# Altium PCB PowerPCB.PcbDoc
Units mil, origin at the board's own origin, x right, y up, seen from the top; angles counter-clockwise.
Board outline 868.14 x 1880.9 mil, 2 copper layers (Top Layer, Bottom Layer); 73 components, 62 nets, 276 pads, 127 vias.
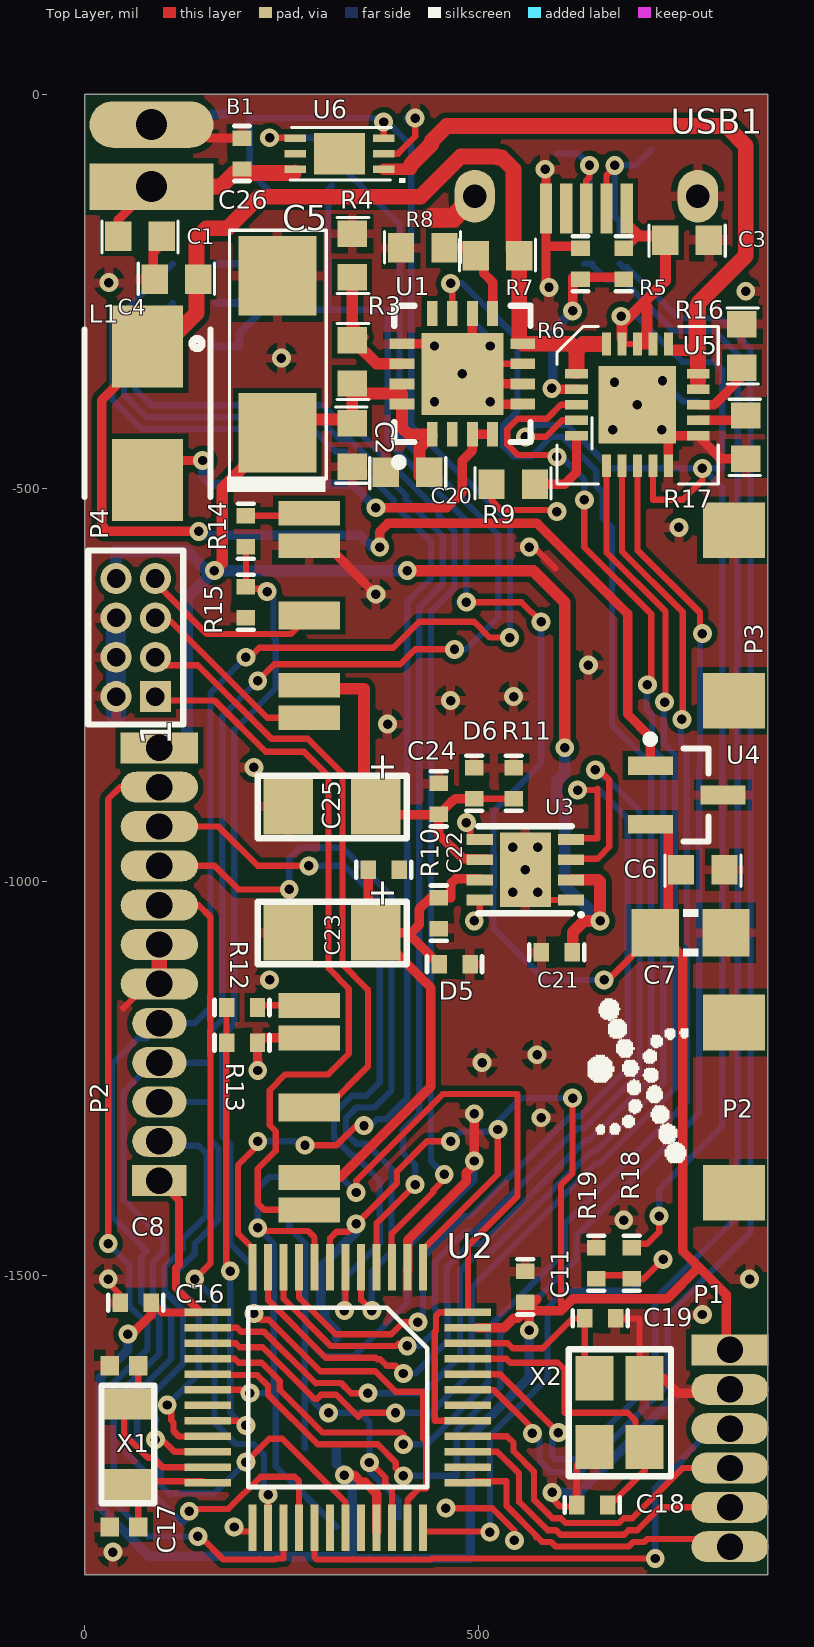
[diagram p0: Top Layer view]
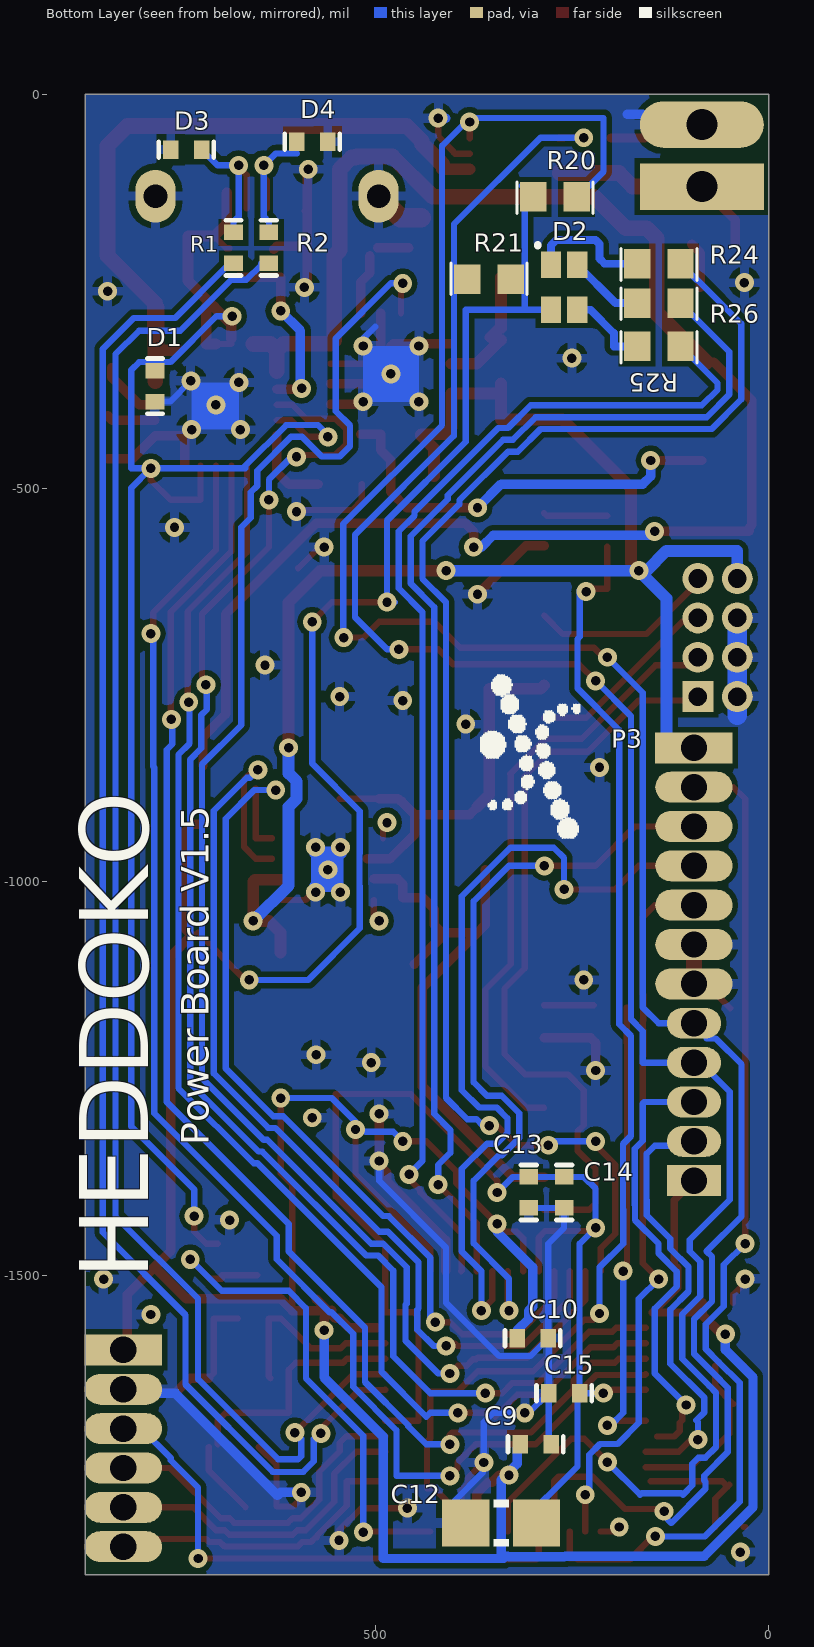
[diagram p1: Bottom Layer view, seen from below]

## Layer stack, top to bottom
Top Solder: solder mask 0.4, Solder Resist, Dk 3.5
Top Layer: signal copper 1.4
Dielectric 1: dielectric 12.6, FR-4, Dk 4.8
Bottom Layer: signal copper 1.4
Bottom Solder: solder mask 0.4, Solder Resist, Dk 3.5

## Board outline
868.14,-1880.9 868.14,0 0,0 0,-1880.9

## Design rules (kind name [scope] priority, off if disabled: settings)
Clearance [All] p1: gap=7
ComponentClearance Header_Clearance [(HasFootprint('Header 6 1.27mm')) vs (HasFootprint('MHDR2X4') OR HasFootprint('Header 6 1.27mm'))] p1: gap=-393.7 collisioncheckmode=3 verticalgap=10 showdistances=FALSE
ComponentClearance [All] p2: gap=10 collisioncheckmode=3 verticalgap=10 showdistances=FALSE
DiffPairsRouting [All] p1: maxlimit=10 minlimit=8 mostfreqgap=8 toplayer_minwidth=8 toplayer_maxwidth=15 toplayer_prefwidth=8 bottomlayer_minwidth=8 bottomlayer_maxwidth=15 bottomlayer_prefwidth=8 maxuncoupledlength=500
PlaneConnect [All] p1: planeconnectstyle=Relief reliefexpansion=31.5 reliefentries=4 reliefconductorwidth=11.81 reliefairgap=7.87
PolygonConnect [All] p1: connectstyle=Relief reliefconductorwidth=11.81 reliefentries=4 polygonreliefangle="90 Angle" airgapwidth=7.87
RoutingVias [All] p1: holewidth=12 width=24 viastyle="Through Hole" minholewidth=12 minwidth=24 maxholewidth=200 maxwidth=200
SilkToSilkClearance [All] p1: silktosilkclearance=0
SilkToSolderMaskClearance [IsPad] p1: minsilkscreentomaskgap=1 clearancetoexposedcopper=TRUE
SolderMaskExpansion [All] p1: expansion=4
Width [All] p1: maxlimit=150 minlimit=8 preferedwidth=10
25 further rules are at their usual default settings.

## Classes and differential pairs
component class PowerPCB: B1 C1 C2 C3 C4 C5 C6 C7 C8 C9 C10 C11 C12 C13 C14 C15 C16 C17 C18 C19 C20 C21 C22 C23 C24 C25 C26 D2 D4 D5 D6 L1 P1 P2 P3 P4 R3 R4 R5 R6 R7 R8 R9 R10 R11 R12 R13 R14 R15 R16 R17 R18 R19 R20 R21 R24 R25 R26 U1 U2 U3 U4 U6 USB1 X1 X2
differential pair USB_D: +USB_D_P -USB_D_N
differential pair USB: +USB_P -USB_N

## Components (designator, comment, footprint, x,y, rotation, side; value= is the part's Value field where it differs from the comment)
B1 "LiPo Battery" "LiPo Battery" 85,-115 r90 top
C1 "" 0603_small 100,-180 r180 top
C2 "" 0603_small 340,-475 r90 top
C3 "" 0603_small 795,-185 r180 top
C4 "" 0603_small 87.05,-235 r0 top
C5 "Cap_Tant" "C 6032-28R" 245,-330 r270 top
C6 "" 0603_small 815,-985 r180 top
C7 "" SMD0805 770,-1065 r90 top
C8 "" 0402 65,-1535 r0 top
C9 "" 0402 296.26,-1715 r0 bottom
C10 "" 0402 300,-1580 r0 bottom
C11 "" 0402 560,-1515 r270 top
C12 "" SMD0805 340,-1815 r270 bottom
C13 "" 0402 305,-1395 r90 bottom
C14 "" 0402 260,-1395 r90 bottom
C15 "" 0402 260,-1650 r180 bottom
C16 "" "CAP 0402" 50,-1615 r180 top
C17 "" "CAP 0402" 50,-1820 r180 top
C18 "4pF" 0402 645,-1792 r180 top
C19 "4pF" 0402 655,-1555 r0 top
C20 "" 0603_small 440,-480 r180 top
C21 "" 0402 600,-1090 r180 top
C22 "" 0402 450,-1040 r270 top
C23 "CAP-POL" 1206 315,-1065 r180 top
C24 "" 0402 450,-895 r90 top
C25 "CAP-POL" 1206 315,-905 r180 top
C26 "" 0402 200,-75 r90 top
D1 "ESD Diode" 0402 779.72,-370.45 r270 bottom
D2 "LED2_RGB" "LED RGB" 260,-245 r270 bottom
D3 "ESD Diode" 0402 740,-70 r0 bottom
D4 "ESD Diode" 0402 580,-60 r180 bottom
D5 "ESD Diode" 0402 470,-1105 r0 top
D6 "ESD Diode" 0402 495,-875 r90 top
L1 "6.8uH" "INDUCTOR - SMALL" 80,-405 r0 top
P1 "header 6 pin" "Header 6 1.27mm"#1 820,-1595 r0 top
P2 "header 6 pin" "Header 6 1.27mm"#2 95,-1380 r180 top
P2 "IP67_Jack" "AUDIOJACK IPX7" 285.43,-1287.2 r270 top locked
P3 "header 6 pin" "Header 6 1.27mm"#1 95,-830 r180 bottom
P3 "IP67_Jack" "AUDIOJACK IPX7" 285.43,-662 r270 top locked
P4 "MHDR2X4" MHDR2X4 90,-765 r90 top
R1 "" 0402 680,-195 r270 bottom
R2 "" 0402 635,-195 r270 bottom
R3 "" 0603_small 340,-310 r270 top
R4 "" 0603_small 340,-175 r270 top
R5 "" 0402 685,-215 r90 top
R6 "" 0402 630,-215 r270 top
R7 "" 0603_small 495,-205 r0 top
R8 "" 0603_small 400,-195 r0 top
R9 "" 0603_small 515,-495 r0 top
R10 "" 0402 380,-985 r180 top
R11 "" 0402 545,-875 r270 top
R12 "" 0402 200,-1160 r0 top
R13 "" 0402 200,-1205 r180 top
R14 "" 0402 205,-555 r90 top
R15 "" 0402 205,-645 r90 top
R16 "" 0603_small 835,-290 r270 top
R17 "" 0603_small 840,-465 r90 top
R18 "" 0402 695,-1485 r90 top
R19 "" 0402 650,-1485 r270 top
R20 "" 0603_small 242.05,-130 r0 bottom
R21 "" 0603_small 385,-235 r180 bottom
R24 "" 0603_small 110,-215 r0 bottom
R25 "" 0603_small 110,-320 r0 bottom
R26 "" 0603_small 110,-265 r0 bottom
U1 "TPS61090" "QFN 16 PQFN VQFN PVQFN 16 RSA" 480,-355 r90 top
U2 "SAM4S4" QFP48 430,-1490 r270 top
U3 "Load SW" SON8_0.65MM 560,-985 r90 top
U4 "AP7333" SOT23-3 765,-890 r0 top
U5 "MCP73871" QFN20 625,-355 r0 top
U6 "LTC2941-1" QFN6 380,-95 r180 top
USB1 "MINIB-USB" "MICRO USB IP67" 637.43,-144.88 r180 top locked
X1 "Xtal 32" "Xtal smd 32khz - larger" 55,-1715 r270 top
X2 "Xtal 16" "XTAL SMD 3.2X2.5" 680,-1675 r90 top

## Footprints (in the part's own frame and the unit in brackets; to place one, negate y for a bottom-side part, rotate by r counter-clockwise, add the part's x,y. Pads: shape width x height; smd on the part's side, far side on the other; paste and mask are expansions set on the pad)
0402 [mm]
  rect 0.5x0.6 smd: 1(-0.5,0) 2(0.5,0)
  silkscreen extent -0.89,-0.25 0.89,0.25
0603_small [mm]
  rect 0.85x0.95 smd: 1(0.052,0) 2(1.452,0)
  silkscreen extent -0.48,-0.48 1.97,0.54, body extent -0.12,-0.43 1.63,0.43, height 1
1206 [mil]
  rect 63x71 smd: 1(-55.12,0) 2(56,0)
  silkscreen extent -94,-39 95,40
"AUDIOJACK IPX7" [mm] "LGY2109-3900F"
  rect 1.8x2 smd: 0(-2.75,13.7) 0(2.75,13.7)
  rect 0.8x2 smd: 1(3.3,0) 2(2.25,0) 4(-2.25,0) 5(-3.3,0)
  rect 0.9x2 smd: 3(0,0)
  body extent -3.91,-0.08 4.09,18.42, height 4.9
"C 6032-28R" [mil] "Cap 2413 6032-28"
  rect 101x99 smd: +(100,0) -(-99.41,0)
  silkscreen extent -157,-64 175,62
"CAP 0402" [mm] "Chip Capacitor, 2-Leads, Body 1.00x0.50mm, IPC Medium Density"
  rect 0.6x0.62 smd: 1(-0.46,0) 2(0.46,0)
  body extent -0.53,-0.28 0.53,0.27, height 0.4
"Header 6 1.27mm"#1 [mm] "SIP Header 1.27mm 6 pins"
  rect 2.5x1 hole 0.85: 1(0,0)
  oval 2.5x1 hole 0.85: 2(0,-1.27) 3(0,-2.54) 4(0,-3.81) 5(0,-5.08) 6(0,-6.35)
  body extent -1.15,-7.15 1.06,0.85, height 6
"Header 6 1.27mm"#2 [mm] "SIP Header 1.27mm 6 pins"
  rect 1.75x1 hole 0.85: 1(0,0)
  oval 1.75x1 hole 0.85: 2(0,-1.27) 3(0,-2.54) 4(0,-3.81) 5(0,-5.08)
  oval 2.5x1 hole 0.85: 6(0,-6.35)
  body extent -1.15,-7.15 1.06,0.85, height 6
"INDUCTOR - SMALL" [mm] "MPI4040"
  rect 2.3x2.65 smd: 1(0,2.15) 2(0,-2.15)
  silkscreen extent -2.03,-2.7 2.03,2.7
"LED RGB" [mm] "160-2162-1-ND"
  rect 0.85x0.65 smd: 1(-0.725,-0.425) 2(-0.725,0.425) 3(0.725,0.425) 4(0.725,-0.425)
  silkscreen extent -1.38,-0.85 -1.35,-0.85, body extent -1.11,-0.75 1.16,0.75, height 1
"LiPo Battery" [mm] "2000mAh"
  rect 1.5x4 hole 1: 1(-0.05,0)
  oval 1.5x4 hole 1: 2(1.95,0)
MHDR2X4 [mm] "Connector; Header; 4x2 Position"
  rect 1x1 hole 0.6: 1(0,0)
  round 1 hole 0.6: 2(0,1.27) 3(1.27,0) 4(1.27,1.27) 5(2.54,0) 6(2.54,1.27) 7(3.81,0) 8(3.81,1.27)
  silkscreen extent -0.9,-0.9 4.71,2.17
"MICRO USB IP67" [mm]
  oval 1.3x1.7 hole 0.762: 0(-3.6,-0.4) 0(3.6,-0.4)
  rect 0.4x1.6 smd: 1(-1.3,0) 2(-0.65,0) 3(0,0) 4(0.65,0) 5(1.3,0)
  body extent -4.15,-5.43 4.15,0.09, height 3.55
QFN6 [mm]
  rect 0.7x0.25 smd: 1(0,0) 2(0,-0.5) 3(0,-1) 4(2.85,-1) 5(2.85,-0.5) 6(2.85,0)
  rect 1.65x1.35 smd: 7(1.425,-0.5)
  silkscreen extent -0.7,-1.35 3.03,0.45
QFN20 [mm]
  rect 0.73x0.3 smd: 1(0,0) 2(0,-0.5) 3(0,-1) 4(0,-1.5) 5(0,-2) 11(3.93,-2) 12(3.93,-1.5) 13(3.93,-1) 14(3.93,-0.5) 15(3.93,0)
  rect 0.3x0.73 smd: 6(0.965,-2.965) 7(1.465,-2.965) 8(1.965,-2.965) 9(2.465,-2.965) 10(2.965,-2.965) 16(2.965,0.965) 17(2.465,0.965) 18(1.965,0.965) 19(1.465,0.965) 20(0.965,0.965)
  rect 2.5x2.5 smd: 21(1.965,-1)
  silkscreen extent -0.63,-3.56 4.57,1.52
"QFN 16 PQFN VQFN PVQFN 16 RSA" [mm] "QFN, 16-Leads, Body 4.00x4.00mm, Pitch 0.65mm, Thermal Pad 2.70x2.70mm, IPC Medium Density PVQFN 16 RSA"
  rect 2.642x2.642 smd: 0(0,0)
  rect 0.8x0.35 smd: 1(-1.95,0.975) 2(-1.95,0.325) 3(-1.95,-0.325) 4(-1.95,-0.975) 9(1.95,-0.975) 10(1.95,-0.325) 11(1.95,0.325) 12(1.95,0.975)
  rect 0.35x0.8 smd: 5(-0.975,-1.95) 6(-0.325,-1.95) 7(0.325,-1.95) 8(0.975,-1.95) 13(0.975,1.95) 14(0.325,1.95) 15(-0.325,1.95) 16(-0.975,1.95)
  silkscreen extent -2.97,-2.2 2.2,2.2, body extent -2.05,-2.05 2.05,2.05, height 0.8
QFP48 [mm]
  rect 1.5x0.25 smd: 1(0,0) 2(0,-0.5) 3(0,-1) 4(0,-1.5) 5(0,-2) 6(0,-2.5) 7(0,-3) 8(0,-3.5) 9(0,-4) 10(0,-4.5) 11(0,-5) 12(0,-5.5) 25(8.4,-5.5) 26(8.4,-5) 27(8.4,-4.5) 28(8.4,-4) 29(8.4,-3.5) 30(8.4,-3) 31(8.4,-2.5) 32(8.4,-2) 33(8.4,-1.5) 34(8.4,-1) 35(8.4,-0.5) 36(8.4,0)
  rect 0.25x1.5 smd: 13(1.45,-6.95) 14(1.95,-6.95) 15(2.45,-6.95) 16(2.95,-6.95) 17(3.45,-6.95) 18(3.95,-6.95) 19(4.45,-6.95) 20(4.95,-6.95) 21(5.45,-6.95) 22(5.95,-6.95) 23(6.45,-6.95) 24(6.95,-6.95) 37(6.95,1.45) 38(6.45,1.45) 39(5.95,1.45) 40(5.45,1.45) 41(4.95,1.45) 42(4.45,1.45) 43(3.95,1.45) 44(3.45,1.45) 45(2.95,1.45) 46(2.45,1.45) 47(1.95,1.45) 48(1.45,1.45)
  silkscreen extent 1.31,-5.64 7.09,0.14
SMD0805 [mil]
  rect 60x60 smd: 1(0,45) 2(0,-45)
  silkscreen extent -30,-10 30,10, body extent -29,-43 29,43, height 43
SON8_0.65MM [mm] "DRB"
  rect 2.4x1.65 smd: 0(0,0)
  rect 0.35x0.85 smd: 1(-0.975,-1.475) 2(-0.325,-1.475) 3(0.325,-1.475) 4(0.975,-1.475) 5(0.975,1.475) 6(0.325,1.475) 7(-0.325,1.475) 8(-0.975,1.475)
  silkscreen extent -1.45,-1.8 1.4,1.52
SOT23-3 [mm] "SOT23-3 MEDIUM DENSITY"
  rect 1.45x0.6 smd: 1(-1.175,0.95) 2(-1.175,-0.95) 3(1.175,0)
  silkscreen extent -1.3,-1.5 0.7,1.92, body extent -0.7,-1.5 0.7,1.5, height 1.1
"XTAL SMD 3.2X2.5" [mil]
  rect 56x48 smd: 0(-43.31,32) 0(44,-31.5) 1(-43.31,-31.5) 2(44,32)
  silkscreen extent -81,-65 81,65
"Xtal smd 32khz - larger" [mm] "ST3215SB  3.2×1.5mm"
  rect 1x1.55 smd: 1(-1.3,0) 2(1.3,0)
  silkscreen extent -1.9,-0.85 1.9,0.85

## Part data
C1 C2 C3 C4 C6 C20 C21 C22 C24 C26: library part Cap
C5: "Capacitor"
C7 C12 C23 C25: library part A01-0492
C8 C9 C10 C11 C13 C14 C15: library part Cap, "Capacitor"
C16 C17: library part A01-0013
C18 C19: library part A01-0018
D2: "RGB Led"
L1: library part L6.2uH, "Inductor"
P2 P3: "IP67 4 pole jack"
P4: "Header, 4-Pin, Dual row"
R1 R2 R6 R8 R10 R11 R12 R13 R14 R15 R19 R20 R24 R25 R26: library part Res3, "Resistor"
R3 R4 R5 R7 R9 R16 R17 R18 R21: library part Res3
U1: "Synchronous Boost Converter With 2-A Switch"
U3: library part TPS2042, "CURRENT-LIMITED, POWER-DISTRIBUTION SWITCHES"
U4: "3.3 V regulator"
USB1: library part CON-USB_1
X2: library part "Xtal 12"

## Via types
v1: diameter 24, hole 12, Top Layer to Bottom Layer, 127 vias

## Nets (pads, with @x,y where several pads share a name; then routed paths per layer and width w, separated by ;. In a path a pad name is that pad's centre, name@x,y a point inside that pad or via, vN(x,y) a via of type N, cw(c..) or ccw(c..) an arc to the next point about the centre after c; other vN are vias at no path point)
BLUELED: R24.1 U2.12 | length 1821.4
  Top Layer w8: U2.12@213.46,-1495 213.46,-1465.99 195,-1447.53 195,-1360 220,-1335 v1(220,-1330) ; v1(280,-1335) 320,-1335 350,-1305 v1(355,-1310)
  Bottom Layer w8: R24.1 91.75,-235.3 90.76,-235.3 35,-291.06 35,-387.43 72.57,-425 290,-425 318.79,-453.79 331.31,-453.79 393,-515.47 393,-520.43 440,-567.43 440,-615.05 410,-645.05 410,-1275 383,-1302 371.21,-1302 363.21,-1310 v1(355,-1310) ; v1(220,-1330) 285,-1330 v1(280,-1335)
CH1: P3.3@285.43,-662 P4.7 | length 232.3
  Top Layer w8: P4.7@90,-620 155.53,-685.53 261.91,-685.53 P3.3@285.43,-662
CH2: P3.1@285.43,-791.92 P4.5 | length 245.9
  Top Layer w8: P4.5@90,-670 110,-670 231.92,-791.92 P3.1@285.43,-791.92
CH4: P2.1@285.43,-1417.12 P4.1 | length 968.7
  Top Layer w8: P4.1@90,-770 165,-770 230,-835 278.79,-835 310,-866.21 310,-1110.37 335.8,-1136.17 335.8,-1218.92 309.72,-1245 254.99,-1245 235.06,-1264.93 235.06,-1309.47 243,-1317.41 243,-1342 220,-1365 220,-1409 228,-1417 285.31,-1417 P2.1@285.43,-1417.12
CH5: P2.3@285.43,-1287.2 P4.3 | length 779.6
  Top Layer w8: P4.3@90,-720 95,-725 143.79,-725 237.46,-818.67 283.67,-818.67 328.78,-863.78 327.62,-864.94 327.62,-1105.06 360,-1137.44 360,-1235 307.8,-1287.2 P2.3@285.43,-1287.2
ENABLE: U1.11 U2.11 | length 2024.5
  Top Layer w8: U2.11@233.15,-1495 233.15,-1531.58 306.57,-1605 370,-1605 372,-1607 375.69,-1607 383.69,-1615 395,-1615 v1(405,-1625) ; v1(465,-240) 467.2,-242.2 U1.11
  Bottom Layer w8: v1(405,-1625) 420,-1625 461.56,-1583.44 461.56,-1537.82 460,-1536.26 460,-1490 490,-1460 505,-1460 637,-1328 641.95,-1328 720,-1249.95 720,-851.17 670,-801.17 670,-549.92 658,-537.92 658,-505.47 650,-497.47 650,-478.01 606.99,-435 593.01,-435 568.01,-460 545,-460 532,-447 532,-420.47 550,-402.47 550,-310 480,-240 v1(465,-240)
FB: R3.1 R4.2 U1.14 | length 158.6
  Top Layer w15: R3.1 340.82,-312.05 370.98,-342.2 U1.14 ; R4.2 340,-297.05 342.05,-297.05 R3.1@353.34,-308.34
GND: B1.2 C1.1 C2.1 C3.1 C4.1 C5.- C6.1 C7.2 C8.1 C9.1 C10.1 C11.1 C12.2 C13.1 C14.1 C15.1 C16.2 C17.2 C18.2 C19.2 C20.2 C21.2 C22.2 C23.2 C24.2 C25.2 C26.2 D1.2 D3.2 D4.2 D5.2 D6.2 P1.2 P2.0 P2.4@285.43,-1198.62 P2.6 P3.0 P3.4@285.43,-573.42 P3.6 P4.2 P4.4 P4.6 R4.1 R6.1 R8.1 R9.1 R11.1 R13.1 R15.1 R16.1 R17.1 R19.1 U1.0 U1.5 U1.6 U1.7 U1.10 U1.13 U2.2 U2.34 U3.0 U3.1 U4.3 U5.10 U5.11 U5.21 U6.2 USB1.0 USB1.5 X2.0 | length 4140.9
  Top Layer w8: C17.2@30,-1820 C17.2 ; v1(30,-1505) 25.31,-1505 45.32,-1525 C8.1 ; C16.2@31.55,-1615 C16.2 ; 49,-1161 80,-1130 P2.6 ; v1(361.92,-1738.08) 363.08,-1738.08 382,-1757 382,-1764.53 390.63,-1773.16 U2.34@390.63,-1825.71 ; U6.2 398.52,-75.31 400.47,-73.37 400.47,-72.53 420,-53 v1(420,-30) ; v1(459,-1796) 517.83,-1796 546,-1824.17 v1(546,-1837) ; U1.0@492.8,-342.2 U1.7 ; R9.1 517.05,-515.67 529.38,-528 598,-528 v1(600,-530) ; v1(565,-575) 571,-575 598,-602 ; U3.0@579.68,-1014.53 588.54,-1023.39 U3.1 ; USB1.5 USB1.5@589.9,-148.53 ; v1(594,-1776) 594,-1784 604,-1794 625.31,-1794 625.31,-1740.99 X2.0@648,-1718.31 ; R6.1@628.6,-196.71 R6.1 ; C19.2 705,-1555 705,-1624.5 X2.0@711.5,-1631
  Top Layer w12: B1.2 140.72,-38.23 157.81,-55.31 C26.2 ; C4.1@87.05,-245 87.05,-200.91 C1.1@97.95,-190 ; v1(220,-1240) 220,-1226.82 219.68,-1227.13 R13.1 226.07,-1198.62 P2.4@285.43,-1198.62 ; P3.4@285.43,-573.42 308.42,-573.42 v1(370,-635) ; U1.13 477.05,-316.61 U1.0@480,-319.57 ; U2.2@410.31,-1495 410.31,-1455.68 485,-1381 485,-1370 495,-1360 v1(495,-1355) v1@495,-1305 ; U1.10 492.79,-342.21 v1(480,-355) U1.0@492.8,-367.8 ; U1.5 518.39,-393.39 U1.0@492.8,-367.8 ; U1.6 U1.0@492.8,-367.8 ; v1@586.25,-96.25 USB1.5 586.25,-193.07 ; v1(590,-245) 586.25,-241.25 586.25,-193.07 ; R6.1@628.6,-196.71 624.95,-193.07 586.25,-193.07 ; X2.0@711.5,-1631 735.25,-1631 754.25,-1650 815,-1650 P1.2 ; U5.10 741.73,-433.74 U5.11 808.94,-462.95 R17.1
  Top Layer w20: P2.6 P3.6
  Top Layer w25: 441.65,-156.8 468.03,-156.8 USB1.0@495.7,-129.13
  Bottom Layer w8: C9.1@280.32,-1720 279.68,-1719.37 C15.1 ; C13.1 C14.1 260,-1440 280.32,-1460.32 C10.1 ; C12.2@399,-1808 399,-1786.57 363,-1750.57 363,-1739.16 v1(361.92,-1738.08) 361.92,-1686.92 350,-1675 v1(310,-1675) 304.68,-1675 C15.1 ; v1(495,-1355) 495,-1380 410,-1465 410,-1535 342.19,-1602.81 303.13,-1602.81 C10.1 ; 500,-295 515.43,-310.43 v1(515.43,-319.57) ; v1@540.31,-1014.53 560,-994.84 v1@560,-985 ; v1@540.31,-955.47 540.31,-965.32 v1@560,-985 ; v1@579.68,-1014.53 579.68,-1004.69 v1@560,-985 ; v1@579.68,-955.47 579.68,-965.31 v1@560,-985 ; v1(734.25,-363.86) 760.53,-390.14 D1.2 ; C15.1 279.68,-1580.63 C10.1
  Bottom Layer w12: B1.2 146.77,-38.23 160,-25 180,-25 ; v1@410.35,-30 v1(420,-30) ; v1(594,-1776) 620.25,-1776 624.25,-1780 754.25,-1650 P1.2@825,-1650
  Bottom Layer w25: 40,-788.53 P4.2 P4.4 P4.6
  other v1: 36,-1852 785,-1550 845,-1505 685,-1430 580,-1300 495,-1295 505,-1230 575,-1220 235,-1125 544.25,-1013.54 575.75,-1013.54 560,-985 544.25,-956.46 575.75,-956.46 215,-855 385,-800 465,-770 545,-765 640,-725 755,-550 671.26,-425.87 733.27,-425.87 702.36,-394.37 444.57,-390.43 515.43,-390.43 673.23,-365.83 250,-335 444.57,-319.57 840,-250 30.91,-239.09 585,-95
GPIO: P3.5@95,-1030 U2.26 | length 915.2
  Top Layer w8: P3.5@95,-1030 145,-1030 160,-1045 160,-1143.11 159.47,-1143.63 159.47,-1176.37 160,-1176.89 160,-1188.1 159.47,-1188.63 159.47,-1221.37 160,-1221.9 160,-1485 v1(140,-1505) ; U2.26@233.15,-1825.71 v1(233.15,-1779.07)
  Bottom Layer w8: v1(140,-1505) 165,-1530 165,-1687.53 192.04,-1714.57 214.43,-1714.57 227.91,-1728.04 227.91,-1777.91 229.07,-1779.07 v1(233.15,-1779.07)
GREENLED: R25.1 U2.3 | length 1535.6
  Top Layer w8: U2.3@390.63,-1495 390,-1494.37 390,-1447.53 443,-1394.53 443,-1392 v1@455,-1380
  Bottom Layer w8: R25.1@112.05,-320 65,-367.05 65,-375 85,-395 302.43,-395 331.21,-423.79 343.74,-423.79 450,-530.05 450,-535 470,-555 470,-627.47 440,-657.47 440,-1355 v1(457,-1372)
"JACK DETECT 1": P2.5@285.43,-1157.28 R12.2 | length 63
  Top Layer w8: R12.2@222.41,-1157.28 P2.5@285.43,-1157.28
"JACK DETECT 2": P3.5@285.43,-532.08 R14.2 | length 81.8
  Top Layer w8: R14.2 282.2,-535.31 P3.5@285.43,-532.08
"JACK EN1": U2.10 U3.3 | length 1258.8
  Top Layer w8: U2.10@252.83,-1495 252.83,-1530.05 312.78,-1590 395.65,-1590 v1@398.65,-1587 ; U3.3@630.98,-970.82 651.72,-970.82 666.72,-955.82 666.72,-871 653.72,-858 v1(649,-858)
  Bottom Layer w8: v1(410,-1590) 425.8,-1590 446.56,-1569.25 446.56,-1544.03 445,-1542.47 445,-1483.79 483.79,-1445 495,-1445 627,-1313 635.74,-1313 705,-1243.74 705,-910 663,-868 659,-868 v1(649,-858)
"JACK EN2": U2.9 U3.4 | length 1160.7
  Top Layer w8: U2.9@272.52,-1495 272.52,-1528.53 318.99,-1575 389.44,-1575 404.72,-1559.72 v1(423.56,-1559.72) ; v1(626.3,-883.7) 649.73,-883.7 651.72,-881.72 651.72,-944.82 U3.4@630.98,-944.82
  Bottom Layer w8: v1(423.56,-1559.72) 423.56,-1558.56 430,-1552.12 430,-1477.57 482.57,-1425 490,-1425 617,-1298 629.53,-1298 690,-1237.53 690,-920 653.7,-883.7 v1(626.3,-883.7)
"JACK OC1": U3.8 | length 29.5
  Top Layer w8: v1(495,-1050) 501.93,-1043.07 U3.8
"JACK OC2": U3.5 | length 22.1
  Top Layer w8: v1(485,-925) 485,-929.07 490,-934.07 U3.5@490,-945
JACK_DET1_3V3: R12.1 R13.2 U2.20 | length 595
  Top Layer w8: U2.20 193.88,-1684.88 200,-1691 v1(205,-1691) ; R12.1 180.32,-1205 180,-1205.31 180,-1490 v1(185,-1495)
  Bottom Layer w8: v1(185,-1495) 185,-1675 201,-1691 v1(205,-1691)
JACK_DET2_3V3: R14.1 R15.2 U2.35 | length 1516.1
  Top Layer w8: R14.1 205,-628 v1@228.48,-628 ; v1(215,-1548.77) 223,-1556.77 234.15,-1556.77 299.38,-1622 369.47,-1622 395.47,-1648 430,-1648 430,-1707.47 434.24,-1711.71 434.24,-1770.76 425.24,-1770.76 410.31,-1785.69 U2.35@410.31,-1825.71 ; v1@225.79,-625.31 v1@228.48,-628 ; v1(231.98,-631.5) v1@228.48,-628
  Bottom Layer w8: v1@215,-1555 v1(215,-1548.77) 215,-1490 185,-1460 185,-1416.88 185.21,-1416.67 185.21,-1333.39 175,-1323.18 175,-1196.21 190,-1181.21 190,-807.53 243,-754.53 243,-692 240,-689 240,-630 233.48,-630 v1(231.98,-631.5)
LBI: R7.1 R8.2 U1.9 | length 117.8
  Top Layer w12: R8.2 R7.1@497.05,-195 ; R7.1@507.05,-205 507.05,-227.05 518.39,-238.39 U1.9
LBO: U1.12
NetB1_1: B1.1 C1.2 C26.1 U6.6 | length 284.6
  Top Layer w12: C1.2@42.84,-190 42.84,-159.13 B1.1 ; U6.6@263.11,-99.68 U6.6@267.79,-95
  Top Layer w20: B1.1 173.03,-116.97 190.31,-99.68 215,-99.68 263.11,-99.68 U6.6@265.35,-99.68
NetC12_1: C12.1 C13.2 C14.2 C15.2 U2.8 U2.18 U2.41 U2.48 | length 1606.1
  Top Layer w8: U2.18 198.51,-1645.51 203,-1650 v1(210,-1650) v1@209.49,-1650.51 ; v1(220,-1440) 223.87,-1443.87 283.87,-1443.87 292.2,-1452.2 U2.8@292.2,-1495 ; v1(345,-1395) 345,-1380 455,-1270 550,-1270 550,-1400 487.09,-1462.91 U2.48 450.91,-1547.09 446.56,-1551.44 446.56,-1570.8 445,-1572.36 445,-1685 486.97,-1685 U2.41
  Bottom Layer w8: v1(210,-1650) C15.2 ; C12.1@320,-1820 242.91,-1742.91 242.91,-1650 C15.2 ; v1(345,-1395) 325.32,-1375.32 C13.2 C14.2 234.68,-1375.31 220,-1390 v1(220,-1440) 240.31,-1460.31 C15.2
NetD2_1: D2.1 R24.2 | length 160.3
  Bottom Layer w10: R24.2 208.47,-215 215,-208.47 215,-190 220,-185 270,-185 276.73,-191.73 D2.1
NetD2_2: D2.2 R26.2 | length 96.2
  Bottom Layer w10: R26.2 194.72,-265 D2.2
NetD2_3: D2.3 R25.2 | length 105.2
  Bottom Layer w10: R25.2 196.81,-320 196.81,-303.19 226.46,-273.54 D2.3
NetR5_1: R5.1 R6.2 U5.2 | length 238.5
  Top Layer w12: v1(593.52,-373.49) 594.71,-374.68 U5.2 ; v1(620,-275) 620,-232.17 R5.1@674.21,-232.17
  Bottom Layer w12: v1(593.52,-373.49) 595,-372.01 595,-300 v1(620,-275)
NetR9_2: R9.2 U5.5 | length 105.3
  Top Layer w12: R9.2 610,-495 625,-480 U5.5
NetR16_2: R16.2 U5.13 | length 81.8
  Top Layer w12: U5.13 799.65,-394.37 835,-359.02 R16.2
NetR17_2: R17.2 U5.12 | length 62.9
  Top Layer w12: U5.12 833.78,-414.05 R17.2
POWERGOOD: U2.15 U5.6 | length 1705.1
  Top Layer w8: U2.15 192.24,-1586.46 197.24,-1591.46 226.41,-1591.46 291.95,-1657 295.47,-1657 300.47,-1652 319.53,-1652 347.53,-1680 352.53,-1675 v1(395,-1675) ; U5.6 662.99,-581.78 738,-656.79 738,-770.84 v1(736.92,-771.92)
  Bottom Layer w8: v1(395,-1675) 430,-1675 435,-1680 492,-1623 492,-1515.47 649.47,-1358 654.38,-1358 750,-1262.38 750,-838.74 735.84,-824.58 735.84,-773 v1(736.92,-771.92)
PROG2: U2.14 U5.3 | length 1890.3
  Top Layer w8: U2.14 193.77,-1566.77 198.77,-1571.77 227.94,-1571.77 293.71,-1637.55 294.26,-1637 325.74,-1637 338.74,-1650 v1(360,-1650) ; v1(600,-460.53) 597.47,-458 550.47,-458 537,-444.53 537,-425.47 550.47,-412 587.54,-412 605.17,-394.37 U5.3 ; v1(635,-515) 635,-575 720,-660 720,-745 v1(715,-750)
  Bottom Layer w8: v1(360,-1650) 430,-1650 477,-1603 477,-1494.21 496.21,-1475 511.26,-1475 643.26,-1343 648.17,-1343 735,-1256.17 735,-844.95 720.84,-830.79 720.84,-788.37 713.92,-781.45 713.92,-751.08 v1(715,-750) ; v1(600,-460.53) 606.32,-460.53 635,-489.21 v1(635,-515)
PWRBUTTON: P3.2@95,-880 U2.27 | length 1284
  Top Layer w8: v1(30,-1460) 30,-895 45,-880 P3.2@95,-880 ; v1(144,-1832) 147,-1832 176.24,-1861.24 222.94,-1861.24 223.31,-1860.87 223.67,-1861.24 242.63,-1861.24 243.86,-1860 252.83,-1860 U2.27@252.83,-1825.71
  Bottom Layer w8: v1(30,-1460) 57,-1487 57,-1539.38 80,-1562.38 80,-1593.83 63.36,-1610.47 37,-1636.83 37,-1687.05 37,-1787.96 81.04,-1832 v1(144,-1832)
REDLED: R26.1 U2.4 | length 1605.9
  Top Layer w8: U2.4@370.94,-1495 370.94,-1434.06 v1(420,-1385)
  Bottom Layer w8: R26.1@112.05,-265 50,-327.05 50,-381.21 78.79,-410 296.21,-410 325,-438.79 337.53,-438.79 408,-509.26 408,-514.21 455,-561.21 455,-621.26 425,-651.26 425,-1295 404.39,-1315.61 404.39,-1344.39 420,-1360 v1(420,-1385)
RST: P1.3 U2.29 | length 691.3
  Top Layer w8: U2.29 292.2,-1858.2 295.24,-1861.24 341.05,-1861.24 341.42,-1860.87 341.78,-1861.24 360.74,-1861.24 361.1,-1860.87 361.47,-1861.24 380.42,-1861.24 380.79,-1860.87 381.15,-1861.24 400.11,-1861.24 400.47,-1860.87 400.84,-1861.24 419.79,-1861.24 420.16,-1860.87 420.52,-1861.24 439.48,-1861.24 440.71,-1860 v1(725,-1860)
  Bottom Layer w8: v1(725,-1860) 725,-1770 759.79,-1735.21 759.79,-1732.29 797.08,-1695 P1.3
RXD0: P2.2@95,-1330 U2.22 | length 558.6
  Top Layer w8: v1(90,-1709) 95,-1709 97,-1707 114.25,-1724.25 U2.22
  Bottom Layer w8: v1(90,-1709) 90,-1686.53 92,-1684.53 82,-1674.53 82,-1655.47 125,-1612.47 125,-1543.74 102,-1520.74 102,-1489.26 125,-1466.26 125,-1453.79 155,-1423.79 155,-1404.45 155.21,-1404.24 155.21,-1345.82 145,-1335.61 100.61,-1335.61 P2.2@95,-1330
RXD1: P3.4@95,-980 U2.5 | length 1044.2
  Top Layer w8: P3.4@95,-980 165,-980 195,-1010 v1(260,-1010) ; U2.5@351.26,-1495 351.26,-1531.26 v1(365,-1545)
  Bottom Layer w8: v1@260,-1015 v1(260,-1010) 260,-970 273,-957 328.21,-957 390,-1018.79 390,-1265 368,-1287 345.47,-1287 332,-1300.47 332,-1319.53 345.47,-1333 358,-1333 390,-1365 390,-1470 365,-1495 v1(365,-1545)
SCL1: P2.5@95,-1180 R20.1 U2.28 U6.3 | length 2914.1
  Top Layer w8: v1(133,-1800) 136,-1797 182.7,-1797 223.62,-1756.07 267.07,-1756.07 272.52,-1761.52 U2.28 U2.28@272.52,-1825.71 ; v1(205,-715) 210,-715 222,-703 392,-703 425,-670 495,-670 515,-690 v1(540,-690) ; U6.3 v1(380,-35)
  Bottom Layer w8: v1(133,-1800) 133,-1805.74 123.74,-1815 80.34,-1771.6 80.34,-1762.49 82,-1760.83 82,-1754.74 52,-1724.74 52,-1693.26 52,-1643.05 69.57,-1625.47 95,-1600.05 95,-1556.17 72,-1533.17 72,-1476.83 79.08,-1469.75 34.55,-1425.22 34.55,-1232.29 67.53,-1199.32 79.08,-1199.32 79.08,-1195.92 95,-1180 140,-1180 160,-1160 160,-760 v1(205,-715) ; R20.1@247.05,-135 210,-97.95 210,-30 380,-30 415,-65 415,-420 540.61,-545.61 v1@540.61,-678.18
SDA1: P2.4@95,-1230 R21.1 U2.31 U6.4 | length 2692.5
  Top Layer w8: v1(204.91,-1737.57) 234.47,-1708 251,-1708 331.57,-1788.57 U2.31@331.57,-1825.71 ; v1(220,-745) 241.16,-723.84 401.16,-723.84 420,-705 v1(470,-705) v1@468,-703 ; v1(235,-55) 267.16,-55 U6.4 U6.4@260.63,-55.63
  Bottom Layer w8: v1(204.91,-1737.57) 163.47,-1779 161.47,-1777 110.95,-1777 108.95,-1779 97,-1767.05 97,-1739.53 89.47,-1732 80.47,-1732 67,-1718.53 67,-1699.47 67,-1649.26 75.79,-1640.47 110,-1606.26 110,-1549.95 87,-1526.95 87,-1483.05 100.3,-1469.75 100.3,-1454.99 49.55,-1404.24 49.55,-1266.84 86.39,-1230 95,-1230 160,-1230 160,-1190 175,-1175 175,-790 v1(220,-745) ; v1(235,-55) 290,-55 400,-165 400,-433.79 525.61,-559.39 525.61,-664.39 485,-705 v1(470,-705)
STAT1: U2.17 U5.8 | length 1829.3
  Top Layer w8: U2.17 157.55,-1627 200.47,-1627 219.53,-1627 233,-1640.47 233,-1651.74 296.26,-1715 372.47,-1715 395.47,-1738 395.47,-1745.47 v1(405,-1755) ; U5.8 702.36,-578.72 781.84,-658.2 781.84,-681.84 v1(785,-685)
  Bottom Layer w8: v1(405,-1755) 473,-1755 473,-1697 528,-1642 528,-1574.47 555.47,-1547 558,-1547 625,-1480 625,-1450 780.76,-1294.24 780.76,-855 781.84,-853.92 781.84,-688.16 v1(785,-685)
STAT2: U2.16 U5.7 | length 1753.9
  Top Layer w8: U2.16 190.72,-1606.14 195.72,-1611.14 224.88,-1611.14 248,-1634.26 248,-1645.53 302.47,-1700 402.47,-1700 405.47,-1703 405.47,-1714.53 v1(405,-1715) ; U5.7 682.68,-580.25 759.92,-657.49 759.92,-792.76 v1(758.84,-793.84)
  Bottom Layer w8: v1(405,-1715) 435,-1715 458,-1692 458,-1690.79 513,-1635.79 513,-1567 610,-1470 610,-1435 765,-1280 765,-832.53 757.76,-825.29 757.76,-794.92 v1(758.84,-793.84)
SW: L1.2 U1.3 U1.4 | length 544
  Top Layer w12: L1.2@84.96,-465 v1(150,-465) ; v1(370,-525) 460,-525 480,-505 480,-465 492.79,-452.21 U1.3 U1.4
  Bottom Layer w12: v1(150,-465) 150,-485 160,-495 340,-495 v1(370,-525)
SW_VCC_1: C22.1 C23.1 D5.1 P2.2@285.43,-1375.78 R10.2 U3.7 | length 747.2
  Top Layer w12: P2.2@285.43,-1375.78 324.57,-1375.78 440,-1260.36 440,-1134.88 C23.1 ; R10.2 360.32,-1055.2 C23.1 ; D5.1 415,-1069.68 415,-1065 ; U3.7@501.93,-996.61 471.61,-996.61 465,-1003.23 465,-1020.31 439.69,-1020.31 425,-1035 425,-1055 415,-1065 ; C23.1 415,-1065
SW_VCC_2: C24.1 C25.1 D6.1 P3.2@285.43,-750.59 R11.2 U3.6 | length 513.2
  Top Layer w8: D6.1 R11.2
  Top Layer w12: C25.1 380.12,-915 449.68,-915 C24.1 ; D6.1 470.67,-894.68 467.2,-898.16 466.53,-898.16 C24.1 ; U3.6@510,-970.82 480.82,-970.82 450,-940 C24.1
  Top Layer w15: P3.2@285.43,-750.59 289.85,-755 355,-755 355,-889.88 C25.1
SWCLK: P1.4 U2.40 | length 434.8
  Top Layer w8: U2.40 536.57,-1704.57 545,-1713 545,-1723.79 571,-1749.79 571,-1785.53 594.47,-1809 605.1,-1809 610.92,-1814.81 679.08,-1814.81 684.89,-1809 696,-1809 760,-1745 P1.4
SWDIO: P1.5 U2.39 | length 407
  Top Layer w8: U2.39 524.25,-1724.25 552,-1752 552,-1787.74 588.26,-1824 598.89,-1824 604.7,-1829.81 685.3,-1829.81 691.11,-1824 702.21,-1824 731.21,-1795 P1.5@815,-1795
SWO: P1.6 U2.37 | length 379.1
  Top Layer w8: U2.37@493.71,-1762 536,-1762 536,-1792.95 574,-1830.95 574,-1833 575.57,-1833 581.57,-1839 592.68,-1839 598.49,-1844.81 691.51,-1844.81 697.32,-1839 710.96,-1839 714.74,-1835.22 797.41,-1835.22 P1.6@810,-1847.81
TXD0: P2.3@95,-1280 U2.21 | length 574.4
  Top Layer w8: v1(105,-1665) 110,-1665 110,-1684.47 113,-1687.47 113,-1698 120,-1705 U2.21@142,-1705
  Bottom Layer w8: P2.3@95,-1280 158.02,-1280 160,-1281.98 160,-1329.39 170.21,-1339.6 170.21,-1410.46 170,-1410.67 170,-1430 140,-1460 140,-1472.47 117,-1495.47 117,-1514.53 145,-1542.53 145,-1625 v1(105,-1665)
TXD1: P3.3@95,-930 U2.6 | length 967.6
  Top Layer w8: P3.3@95,-930 170,-930 220,-980 v1(285,-980) ; v1@331.57,-1543.43 U2.6@331.57,-1495
  Bottom Layer w8: v1(285,-980) 330,-980 375,-1025 375,-1255 358,-1272 339.26,-1272 317,-1294.26 317,-1325.74 339.26,-1348 343,-1348 375,-1380 375,-1459.54 330,-1504.54 v1(330,-1545)
USB_D_N: R1.2 U2.43 | length 1935
  Top Layer w8: U2.43 487.57,-1646 520,-1646 570,-1696 569,-1697 v1(569,-1701) ; v1@570,-1700 v1@570,-1699.9
  Bottom Layer w8: v1(569,-1701) 571,-1701 578,-1708 578,-1736.63 591.37,-1750 630,-1750 741,-1639 741,-1550.63 846,-1445.63 846,-323.37 806.63,-284 754.16,-284 689.68,-219.53 684,-219.53 684,-218.68 R1.2
USB_D_P: R2.2 U2.44 | length 1943.6
  Top Layer w8: U2.44 527.83,-1625.83 532.83,-1630.83 v1(602,-1700)
  Bottom Layer w8: v1(602,-1700) 594,-1708 594,-1730 598,-1734 623.37,-1734 725,-1632.37 725,-1530 830,-1425 830,-330 800,-300 747.53,-300 683.06,-235.53 663.63,-235.53 645,-216.89 645,-214.68 R2.2
USB_DETECT: R18.1 R19.2 U2.36 | length 669.3
  Top Layer w8: U2.36@430,-1825.71 515.71,-1825.71 v1(515,-1826.42) ; R19.2@650,-1500 R18.1@695,-1500 ; R18.1 710.31,-1504.68 v1(735,-1480)
  Bottom Layer w8: v1(515,-1826.42) 515,-1704.04 588,-1631.04 588,-1542 610,-1520 695,-1520 v1(735,-1480)
USB_N: D3.1 R1.1 USB1.2 | length 202.3
  Top Layer w8: USB1.2 663.02,-102.42 673.5,-91.94 v1(673.5,-90)
  Bottom Layer w8: R1.1 680,-161.47 673.5,-154.97 v1(673.5,-90) 700.31,-90 D3.1
USB_P: D4.1 R2.1 USB1.3 | length 192.6
  Top Layer w8: USB1.3 637.43,-109.39 641.5,-105.32 v1(641.5,-90)
  Bottom Layer w8: 599.68,-75 626.5,-75 v1(641.5,-90) 641.5,-154.97 635,-161.47 R2.1
VBAT: C4.2 L1.1 R7.2 U1.8 U4.1 U5.1 U5.20 | length 2197.5
  Top Layer w12: L1.1@80,-340.04 69.96,-340.04 21.72,-388.28 21.72,-547.2 25,-550.47 25,-555 v1(145,-555) ; v1@375,-565 v1(375,-575) 375,-555.36 385.35,-545 575,-545 690,-660 690,-787.52 718.74,-816.26 U4.1
  Top Layer w20: L1.1@80,-340.04 142.17,-277.87 142.17,-182.83 155,-170 181.55,-170 221.55,-130 426.73,-130 478.06,-78.67 523.67,-78.67 525,-80 530,-80 545,-95 545,-197.83 R7.2 552.17,-312.01 U1.8 616.61,-316.61 625,-325 ; U5.1@625,-351.68 625,-325 ; 655,-317.01 632.99,-317.01 625,-325
  Bottom Layer w12: v1@145,-560 350,-560 365,-575 v1(375,-575)
VBUS: C3.2 D1.1 R5.2 R18.2 U5.4 U5.9 U5.17 U5.18 U5.19 USB1.1 | length 2185.1
  Top Layer w8: v1(560,-435) 585.75,-435 606.7,-414.05 U5.4 ; U5.19@682.88,-317.01 U5.18 ; R5.2 689.08,-195.31 704.39,-180 ; R18.2@700,-1460.31 714.68,-1460.31 730,-1445 v1(730,-1425) ; U5.9 722.05,-515 760,-515 785,-490 v1(785,-475)
  Top Layer w13.78: U5.19@682.88,-310 682.88,-291.84 705,-269.72 ; USB1.1@688.61,-125 688.61,-164.22 704.39,-180 737.83,-180 737.83,-236.89 705,-269.72 ; U5.18 715,-317.01 714.72,-316.73 714.72,-269.72 705,-269.72
  Bottom Layer w8: v1(560,-435) 557.57,-435 572.57,-420 613.21,-420 665,-471.79 665,-475 810,-475 810,-350 800,-340 760,-340 701.73,-281.73 v1(681.73,-281.73) ; v1(730,-1425) 730,-1391.21 810,-1311.21 810,-500 v1(785,-475)
VCC: C6.2 C7.1 C8.2 C9.2 C10.2 C11.2 D2.4 P1.1 P2.1@95,-1380 R20.2 R21.2 U2.1 U2.7 U2.13 U2.33 U2.47 U4.2 | length 5303.3
  Top Layer w8: U2.7@311.89,-1495 U2.7 311.89,-1453.11 320,-1445 335,-1445 v1(345,-1435) 397,-1383 397,-1368 435,-1330 v1(465,-1330) ; U2.1@430,-1495 430,-1467 525,-1372 v1(525,-1315) ; v1(485,-645) 555,-645 v1(580,-670) ; 605.28,-1545 605.28,-1385.28 620,-1370.55 v1(620,-1275) ; v1(660,-1125) 665,-1125 C7.1
  Top Layer w10: C8.2@90.51,-1539.69 98.33,-1547.5 147.5,-1547.5 116,-1516 116,-1491.06 120,-1487.06 120,-1405 P2.1@95,-1380
  Top Layer w12: v1(55,-1575) 60,-1575 84.69,-1550.31 C8.2 ; v1(330,-1754) 342.49,-1754 351.57,-1763.08 356.51,-1763.08 370.94,-1777.51 U2.33 U2.33@370.94,-1825.71 ; U2.47@498,-1567 533,-1567 545,-1555 550.27,-1555 574.68,-1530.59 ; C11.2@555,-1544.37 557.95,-1547.32 565,-1554.37 v1(565,-1570) ; 565,-1545 605.28,-1545 620.09,-1530.19 739.81,-1530.19 780.19,-1489.81 ; U4.2 732.4,-927.4 741.34,-936.34 741.34,-1060.06 733.2,-1068.2 760,-1095 760,-1469.55 780.19,-1489.81 ; P1.1 815,-1590 815,-1524.62 780.19,-1489.81
  Bottom Layer w8: D2.4 310,-273.54 ; R20.2@313.92,-116.08 310,-120 310,-273.54 ; v1(465,-1330) 477,-1318 512,-1318 ; v1(485,-645) 475,-645 485,-635 485,-541.21 385,-441.21 385,-273.54 310,-273.54 ; v1(525,-1315) 525,-1305 555,-1275 v1(620,-1275) ; v1(580,-670) 580,-850 519.47,-910.53 519.47,-964.11 520,-964.63 520,-1005.37 519.47,-1005.89 519.47,-1059.47 585,-1125 v1(660,-1125)
  Bottom Layer w12: v1(55,-1575) 55,-1594.79 20,-1629.79 20,-1795 82,-1857 258.62,-1857 259.62,-1858 330.39,-1858 331.39,-1857 340,-1857 340,-1760 319.69,-1739.69 C9.2@319.69,-1720 ; C10.2@319.64,-1570 305,-1555.36 305,-1545 300,-1540 300,-1490 345,-1445 v1(345,-1435) ; C10.2 C10.2@319.69,-1570 ; 337,-1860 490,-1860 490,-1780 ; 490,-1828.38 490,-1780 ; v1(565,-1570) 565,-1630 490,-1705 490,-1780
VLIPO: U5.14 U5.15 U5.16 U6.1 | length 939.9
  Top Layer w15: U6.1@380,-95 415,-95 ; 415,-85 441,-59 ; 750.44,-325 775,-325 775,-270 779.72,-265.28
  Top Layer w20: 415,-88.54 441,-62.54 441,-59 460,-40 815,-40 840,-65 840,-205 779.72,-265.28 779.45,-344.68 779.45,-364.37
VOUT: C2.2 C5.+ C20.1 C21.1 P3.1@95,-830 P4.8 R3.2 U1.1 U1.15 U1.16 U3.2 | length 2086
  Top Layer w15: v1(165,-605) 175,-595 175,-500 262.17,-412.83 340,-412.83 R3.2@340,-382.5 ; R3.2 R3.2@340,-382.5 ; v1(410,-605) 570,-605 610,-645 v1(610,-830) ; C20.1@425.31,-485 425.31,-449.69 441.61,-433.39 U1.1 411.77,-431.77 403.23,-423.23 403.23,-380 342.5,-380 R3.2@340,-382.5 ; U3.2 652.79,-997.8 655,-1000 v1(655,-1050) 635,-1050 620.31,-1064.68 C21.1@620.31,-1090
  Bottom Layer w15: P4.8 40,-580 130,-580 155,-605 v1(165,-605) ; P3.1@60,-835 110,-835 130,-815 130,-640 v1(165,-605) ; v1(410,-605) v1(165,-605) ; v1(610,-830) 610,-862.52 599.8,-872.72 599.8,-894.67 610,-904.87 610,-1005 v1(655,-1050)
XIN12: C19.1 U2.46 X2.2 | length 243.6
  Top Layer w8: U2.46 537.46,-1586.46 544,-1593 582,-1593 620,-1555 C19.1 635.31,-1628.69 X2.2@633,-1631
XIN32: C17.1 U2.24 X1.2 | length 161.3
  Top Layer w8: X1.2@50,-1766.18 X1.2@52.5,-1768.68 ; C17.1 68.11,-1784.29 X1.2@52.5,-1768.68 ; U2.24@149.76,-1762 59.18,-1762 X1.2@52.5,-1768.68
XOUT12: C18.1 U2.45 X2.1 | length 403.7
  Top Layer w8: U2.45 535.93,-1606.14 540.93,-1611.14 601.14,-1611.14 610,-1620 610,-1675 690,-1675 700,-1685 X2.1@700,-1714.8 ; C18.1@664.68,-1795 711.5,-1748.19 X2.1
XOUT32: C16.1 U2.23 X1.1 | length 220
  Top Layer w8: X1.1@45,-1663.82 68.11,-1640.71 C16.1 ; X1.1@50,-1663.82 50,-1701.53 80.47,-1732 87,-1732 98.94,-1743.94 U2.23
pads on no net: R10.1 U1.2 U2.19 U2.25 U2.30 U2.32 U2.38 U2.42 U6.5 U6.7 USB1.4
copper on no net: | length 24.8
  Top Layer w8: 213.46,-1825.71 v1@190.71,-1825.71 ; v1@190.71,-1825.71 190,-1825 v1@190.71,-1825.71
  other v1: 190,-1820

## Polygon pours and split planes (outlines as drawn)
GND on Top Layer "TopLayer-GND" (solid, remove dead copper, pour order 10): 0,0 868.14,0 868.14,-1880.9 0,-1880.9
GND on Bottom Layer "Bottom Layer-No Net" (solid, remove dead copper, pour order 12): 0,0 868.14,0 868.14,-1880.9 0,-1880.9

## Other copper
Bottom Layer:
  rectangle net GND: 540.32,-1013.54 581.65,-955.47
  rectangle net GND: 673.23,-425.87 733.27,-365.83
  rectangle net GND: 444.57,-390.43 515.43,-319.57

## Silkscreen, mask and mechanical layers (free items; w line width, h text height)
Top Overlay:
  drawing of 192 lines, arcs and shapes, not listed
  text "+" at 405,-835 h59.06 r90
  text "+" at 405,-995 h59.06 r90
Bottom Overlay:
  drawing of 191 lines, arcs and shapes, not listed
  text "Power Board V1.5" at 700,-1335 h60 r270
  text "HEDDOKO" at 760,-1505 h150 r270
Mechanical 27:
  the board outline again, w6.3

## Text inside footprints (layer, text, board x,y; h text height)
P4: Top Overlay "1" at 110,-827.99 h39.37 r90